# Altium PCB 遥控器拓展板.PcbDoc
Units mil, origin at the board's own origin, x right, y up, seen from the top; angles counter-clockwise.
Board outline 3950.03 x 1065.03 mil, 2 copper layers (Top Layer, Bottom Layer); 7 components, 8 nets, 22 pads, 4 vias.
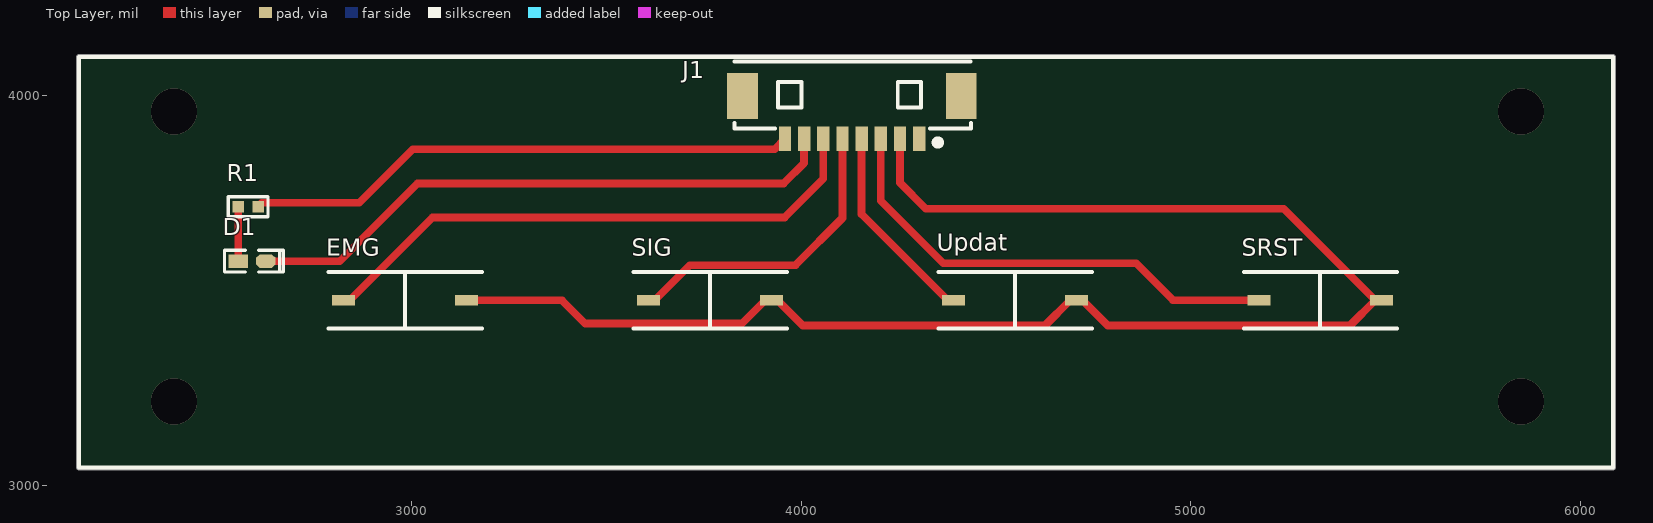
[diagram p0: Top Layer view]
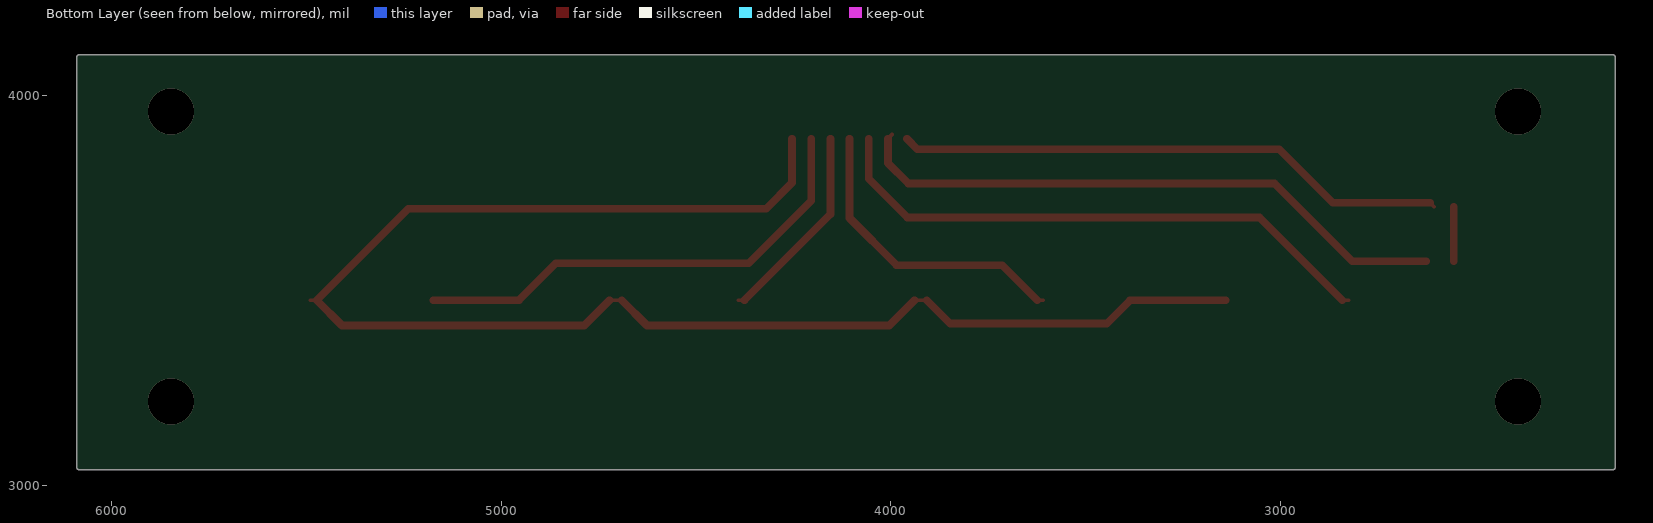
[diagram p1: Bottom Layer view, seen from below]

## Layer stack, top to bottom
Top Solder: solder mask 0.4, Solder Resist, Dk 3.5
Top Layer: signal copper 1.4
Dielectric 1: dielectric 12.6, FR-4, Dk 4.8
Bottom Layer: signal copper 1.4
Bottom Solder: solder mask 0.4, Solder Resist, Dk 3.5

## Board outline
2145,3039.99 cw(c2145,3045) 2139.99,3045 2139.99,4100 cw(c2145,4100) 2145,4105.02 6082.01,4105.02 cw(c6082.01,4100) 6083.5,4104.79 cw(c6085,4100) 6090.02,4100 6090.02,3045 cw(c6085,3045) 6083.5,3040.21 cw(c6082.01,3045) 6082.01,3039.99

## Design rules (kind name [scope] priority, off if disabled: settings)
Clearance [All] p1: gap=10 ignorepadtopadclearanceinfootprint=FALSE except(0: Arc-Hole Track-Hole SMDPad-Hole THPad-Hole Via-Hole Fill-Hole Poly-Hole Region-Hole Text-Hole)
PolygonConnect [All] p1: connectstyle=Relief reliefconductorwidth=10 reliefentries=4 polygonreliefangle="90 Angle" airgapwidth=10
RoutingVias [All] p1: holewidth=28 width=50 viastyle="Through Hole" minholewidth=28 minwidth=50 maxholewidth=28 maxwidth=50
SolderMaskExpansion [All] p1: expansion=4
Width [All] p1: maxlimit=50 minlimit=10 preferedwidth=10
30 further rules are at their usual default settings.

## Components (designator, comment, footprint, x,y, rotation, side; value= is the part's Value field where it differs from the comment)
D1 "LED" "LED 0603" 2590,3575 r0 top
EMG "SW" "SW SMD 3x6x2.5" 2825.04,3475 r0 top
J1 "XM1.25" "MX1.25 8P" 4130,4000 r180 top
R1 "500" "R 0603" 2580,3715 r180 top
SIG "SW" "SW SMD 3x6x2.5" 3608.36,3475 r0 top
SRST "SW" "SW SMD 3x6x2.5" 5175,3475 r0 top
Updat "SW" "SW SMD 3x6x2.5" 4391.68,3475 r0 top

## Footprints (in the part's own frame and the unit in brackets; to place one, negate y for a bottom-side part, rotate by r counter-clockwise, add the part's x,y. Pads: shape width x height; smd on the part's side, far side on the other; paste and mask are expansions set on the pad)
"LED 0603" [mil]
  rect 50x35 smd: 1(-35,0.26)
  oct 50x35 smd: 2(35,0.26)
  silkscreen extent -71,-28 81,28, body extent -31,-16 32,16, height 24
"MX1.25 8P" [mm]
  rect 2x3 smd: 0(-7.132,0) 0(7.132,0)
  rect 0.8x1.6 smd: 1(-4.389,2.811) 2(-3.139,2.811) 3(-1.889,2.811) 4(-0.639,2.811) 5(0.611,2.811) 6(1.861,2.811) 7(3.111,2.811) 8(4.361,2.811)
  silkscreen extent -7.77,-2.23 7.67,3.25, body extent -7.57,-2.1 7.58,3.09, height 3.4
"R 0603" [mil]
  rect 30x30 smd: 1(-25.59,0) 2(25.59,0)
  silkscreen extent -51,-26 51,26, body extent -31,-16 32,16, height 16
"SW SMD 3x6x2.5" [mm]
  rect 1.5x0.7 smd: 1(0,0) 2(8,0)
  silkscreen extent -0.98,-1.85 9.02,1.85

## Part data
D1: "Typical INFRARED GaAs LED", LatestRevisionDate=08-Jul-2005, LatestRevisionNote="Mech Layer 1 removed.", PackageDescription="LED; 2 Leads", PackageReference=LED-0, Published=8-Jun-2000, Publisher="Altium Limited"
EMG SIG SRST Updat: library part 弹簧开关
J1: library part 1X8排针
R1: library part Res, "Resistor", LatestRevisionDate=17-Jul-2002, LatestRevisionNote="Re-released for DXP Platform.", PackageDescription="Axial Device, Thru-Hole; 2 Leads; 0.3 in Pin Spacing", PackageReference=AXIAL-0.3, Published=8-Jun-2000, Publisher="Altium Limited"

## Via types
v1: diameter 118.11, hole 118.11, Top Layer to Bottom Layer, 4 vias

## Nets (pads, with @x,y where several pads share a name; then routed paths per layer and width w, separated by ;. In a path a pad name is that pad's centre, name@x,y a point inside that pad or via, vN(x,y) a via of type N, cw(c..) or ccw(c..) an arc to the next point about the centre after c; other vN are vias at no path point)
EXIO_6: D1.2 J1.7 | length 1564
  Top Layer w10: J1.7@3996.76,3900.09 J1.7
  Top Layer w20: D1.2 2815.26,3575.26 3015,3775 3955,3775 4007.51,3827.51 J1.7
EXIO_7: EMG.1 J1.6 | length 1463.4
  Top Layer w10: EMG.1 EMG.1@2840.79,3475
  Top Layer w20: EMG.1@2840.79,3475 3053.49,3687.71 3957.71,3687.71 4056.72,3786.72 J1.6
EXIO_8: J1.5 SIG.1 | length 788.4
  Top Layer w10: SIG.1 SIG.1@3624.11,3475
  Top Layer w20: SIG.1@3624.11,3475 3714.11,3565 3985,3565 4105.93,3685.93 J1.5
EXIO_9: J1.4 Updat.1 | length 521.5
  Top Layer w10: Updat.1@4375.93,3475 Updat.1
  Top Layer w20: J1.4 4155.15,3695.79 Updat.1@4375.93,3475
EXIO_10: J1.3 SRST.1 | length 1235.2
  Top Layer w20: J1.3 4204.36,3730.64 4365,3570 4860,3570 4955,3475 SRST.1
GND: EMG.2 J1.2 SIG.2 SRST.2 Updat.2 | length 3965.8
  Top Layer w10: SIG.2@3907.57,3475 SIG.2 SIG.2@3939.07,3475 ; Updat.2@4690.89,3475 Updat.2 Updat.2@4722.39,3475 ; SRST.2@5474.21,3475 SRST.2
  Top Layer w20: EMG.2 3385.53,3475 3445.53,3415 3847.57,3415 SIG.2@3907.57,3475 ; SIG.2@3939.07,3475 4004.07,3410 4625.89,3410 Updat.2@4690.89,3475 ; J1.2 4253.57,3776.43 4320,3710 5239.21,3710 5474.21,3475 5409.21,3410 4787.39,3410 Updat.2@4722.39,3475
NetD1_1: D1.1 R1.2 | length 140
  Top Layer w10: D1.1@2554.41,3575.85 D1.1
  Top Layer w20: D1.1@2554.41,3575.85 R1.2
VSS3.3: J1.8 R1.1 | length 1424.9
  Top Layer w10: R1.1 R1.1@2615.59,3725
  Top Layer w20: R1.1@2615.59,3725 2865,3725 3002.85,3862.85 3931.8,3862.85 J1.8
pads on no net: J1.0 J1.1
copper on no net:
  other v1: 2390,3215 5848.78,3215 2390,3960 5848.78,3960

## Silkscreen, mask and mechanical layers (free items; w line width, h text height)
Top Overlay:
  lines w10: 6082.01,3045 2145,3045 2145,4100 6082.01,4100 ; 6085,3045 6085,4100